# Altium PCB PCB1.PCBDOC
Units mil, origin at the board's own origin, x right, y up, seen from the top; angles counter-clockwise.
Board outline 6000 x 4000 mil, 2 copper layers (Top Layer, Bottom Layer); 31 components, 65 nets, 180 pads, 0 vias.
Unrouted connection lines stored in the file: 104.
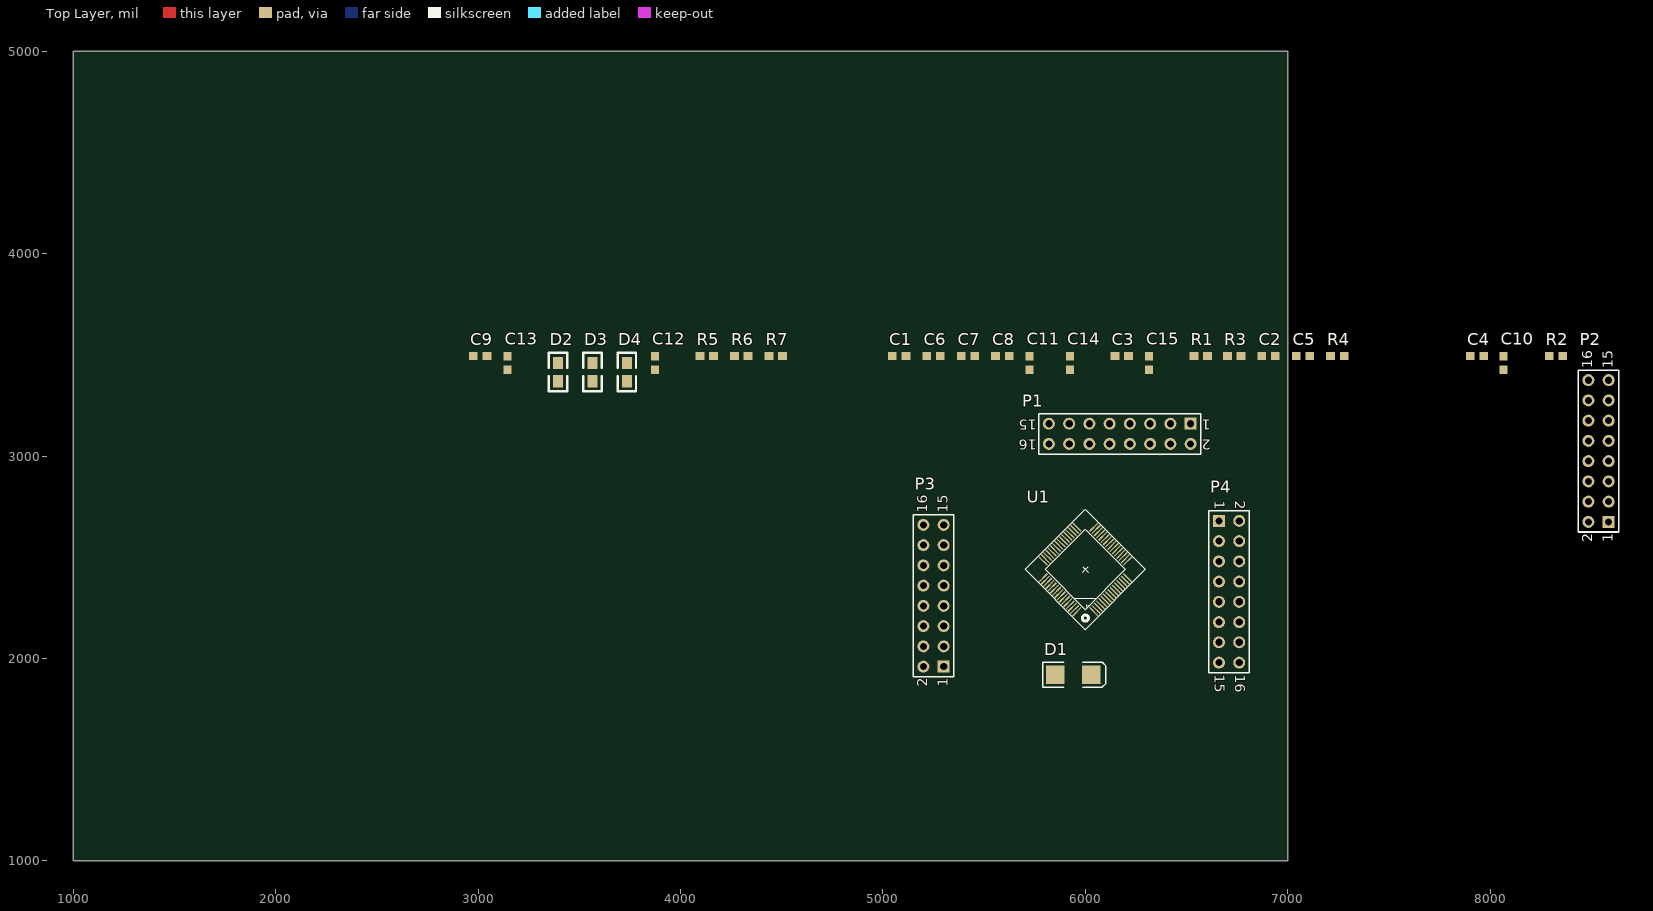
[diagram p0: Top Layer view]
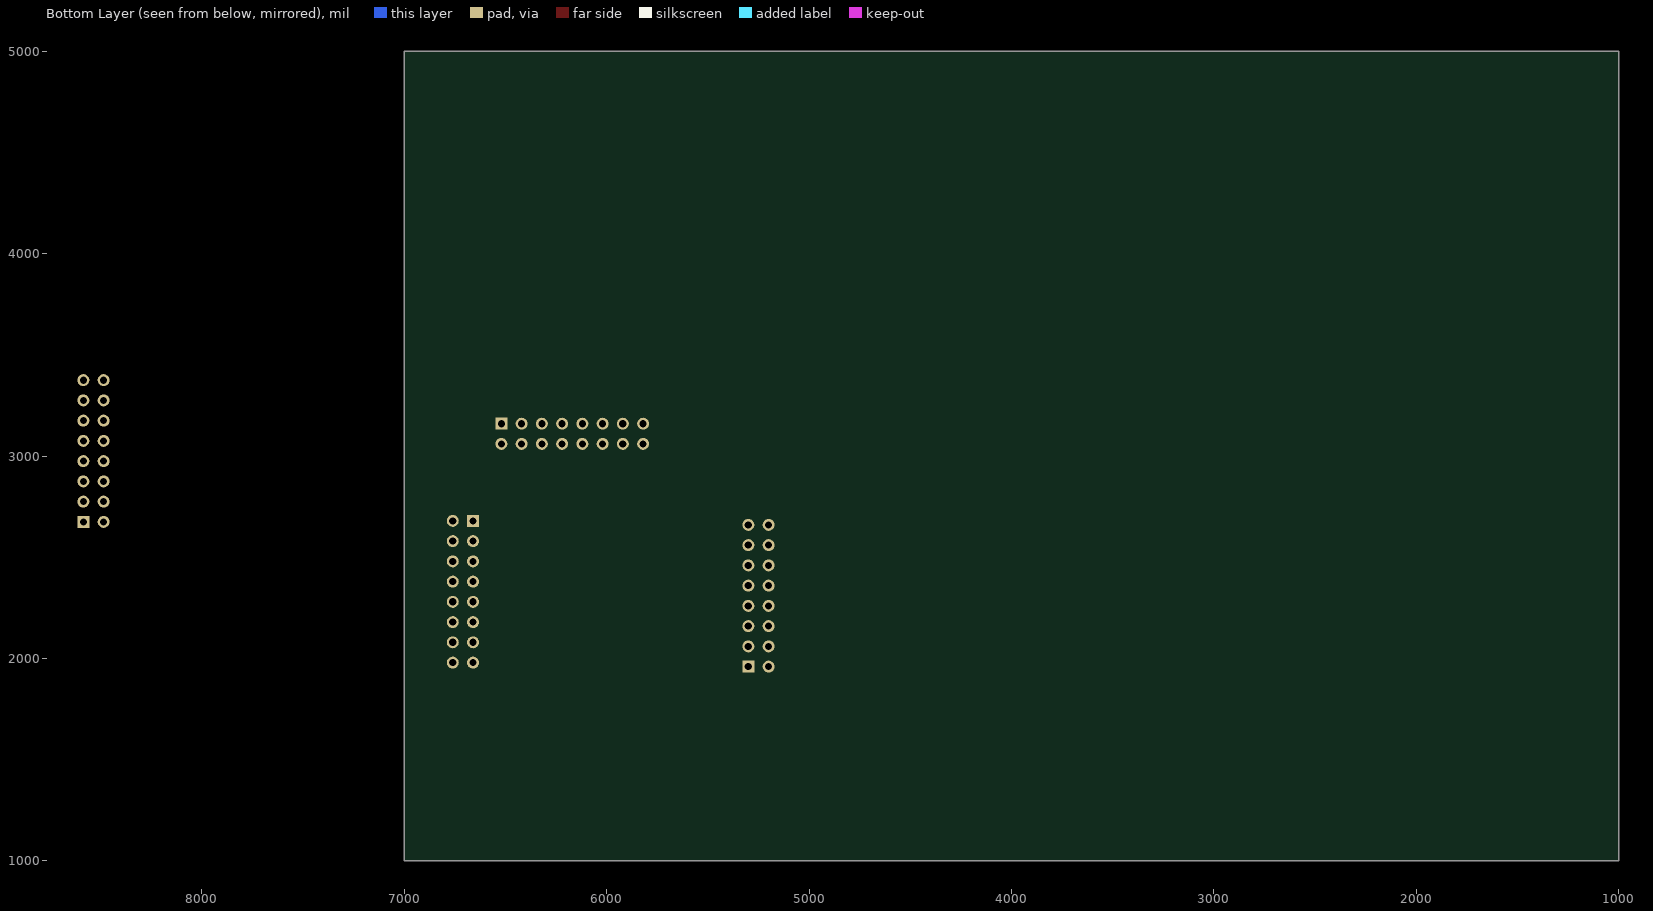
[diagram p1: Bottom Layer view, seen from below]

## Layer stack, top to bottom
Top Layer: signal copper 1.4
Dielectric: dielectric 12.6, FR-4, Dk 4.8
Bottom Layer: signal copper 1.4

## Board outline
1000,1000 7000,1000 7000,5000 1000,5000

## Design rules (kind name [scope] priority, off if disabled: settings)
Clearance [All] p1: gap=10
ComponentClearance [All] p1: gap=10 collisioncheckmode=3 verticalgap=10
PolygonConnect [All] p1: connectstyle=Relief reliefconductorwidth=10 reliefentries=4 polygonreliefangle="90 Angle"
RoutingVias [All] p1: holewidth=28 width=50 viastyle="Through Hole" minholewidth=28 minwidth=50 maxholewidth=28 maxwidth=50
SolderMaskExpansion [All] p1: expansion=4
TestPointUsage [All] p1: valid=0 allowmultiple=FALSE
Testpoint [All] p1: side=15 testpointundercomponent=TRUE minsize=40 maxsize=100 preferedsize=60 minholesize=0 maxholesize=40 preferedholesize=32 testpointgrid=1 style=1023 order=0123456789
Width [All] p1: maxlimit=10 minlimit=10 preferedwidth=10
18 further rules are at their usual default settings.

## Components (designator, comment, footprint, x,y, rotation, side; value= is the part's Value field where it differs from the comment)
C1 "Cap" 1608[0603] 5080,3495 r0 top
C2 "Cap" 1608[0603] 6905,3495 r0 top
C3 "Cap" 1608[0603] 6180,3495 r0 top
C4 "Cap Semi _" 1608[0603] 7935,3495 r0 top
C5 "Cap Semi _" 1608[0603] 7075,3495 r0 top
C6 "Cap" 1608[0603] 5250,3495 r0 top
C7 "Cap" 1608[0603] 5420,3495 r0 top
C8 "Cap" 1608[0603] 5590,3495 r0 top
C9 "Cap" 1608[0603] 3010,3495 r0 top
C10 "Cap Pol2" 1608[0603] 8065,3460 r90 top
C11 "Cap" 1608[0603] 5725,3460 r90 top
C12 "Cap" 1608[0603] 3875,3460 r90 top
C13 "Cap" 1608[0603] 3145,3460 r90 top
C14 "Cap" 1608[0603] 5925,3460 r90 top
C15 "Cap" 1608[0603] 6315,3460 r90 top
D1 "D Schottky" SMB 5940,1920 r0 top
D2 "LED0" 0805 3395,3370 r90 top
D3 "LED0" 0805 3565,3370 r90 top
D4 "LED0" 0805 3735,3370 r90 top
P1 "Header 16" HDR2X8 6520,3160 r180 top
P2 "Header 16" HDR2X8 8585,2675 r90 top
P3 "Header 16" HDR2X8 5300,1960 r90 top
P4 "Header 16" HDR2X8 6660,2680 r270 top
R1 "Res2" 1608[0603] 6570,3495 r0 top
R2 "Res2" 1608[0603] 8325,3495 r0 top
R3 "Res2" 1608[0603] 6735,3495 r0 top
R4 "Res2" 1608[0603] 7245,3495 r0 top
R5 "Res2" 1608[0603] 4130,3495 r0 top
R6 "Res2" 1608[0603] 4300,3495 r0 top
R7 "Res2" 1608[0603] 4470,3495 r0 top
U1 "NUC120_64" PCBComponent_1 6000,2440 r180 top

## Footprints (in the part's own frame and the unit in brackets; to place one, negate y for a bottom-side part, rotate by r counter-clockwise, add the part's x,y. Pads: shape width x height; smd on the part's side, far side on the other; paste and mask are expansions set on the pad)
0805 [mil]
  rect 60x50 smd: 1(0,0) 2(90,0)
  silkscreen extent -50,-45 140,45
1608[0603] [mm] "Chip Capacitor; Body 1.6 x 0.8 mm (LxW typ)"
  rect 1.1x1 smd: 1(-0.85,0) 2(0.85,0)
HDR2X8 [mm] "Connector; Header; 8x2 Position"
  rect 1.5x1.5 hole 0.9: 1(0,0)
  round 1.5 hole 0.9: 2(0,2.54) 3(2.54,0) 4(2.54,2.54) 5(5.08,0) 6(5.08,2.54) 7(7.62,0) 8(7.62,2.54) 9(10.16,0) 10(10.16,2.54) 11(12.7,0) 12(12.7,2.54) 13(15.24,0) 14(15.24,2.54) 15(17.78,0) 16(17.78,2.54)
  silkscreen extent -1.27,-1.27 19.05,3.81
PCBComponent_1 [mil]
  rect 60x7 smd rot 135: 1(-41.76,208.79) 2(-52.89,197.66) 3(-64.03,186.52) 4(-75.16,175.38) 5(-86.3,164.25) 6(-97.44,153.11) 7(-108.57,141.98) 8(-119.71,130.84) 9(-130.84,119.71) 10(-141.98,108.57) 11(-153.11,97.44) 12(-164.25,86.3) 13(-175.38,75.16) 14(-186.52,64.03) 15(-197.66,52.89) 16(-208.79,41.76) 33(41.76,-208.79) 34(52.89,-197.66) 35(64.03,-186.52) 36(75.16,-175.38) 37(86.3,-164.25) 38(97.44,-153.11) 39(108.57,-141.98) 40(119.71,-130.84) 41(130.84,-119.71) 42(141.98,-108.57) 43(153.11,-97.44) 44(164.25,-86.3) 45(175.38,-75.16) 46(186.52,-64.03) 47(197.66,-52.89) 48(208.79,-41.76)
  rect 60x7 smd rot 45: 17(-208.79,-41.76) 18(-197.66,-52.89) 19(-186.52,-64.03) 20(-175.38,-75.16) 21(-164.25,-86.3) 22(-153.11,-97.44) 23(-141.98,-108.57) 24(-130.84,-119.71) 25(-119.71,-130.84) 26(-108.57,-141.98) 27(-97.44,-153.11) 28(-86.3,-164.25) 29(-75.16,-175.38) 30(-64.03,-186.52) 31(-52.89,-197.66) 32(-41.76,-208.79) 49(208.79,41.76) 50(197.66,52.89) 51(186.52,64.03) 52(175.38,75.16) 53(164.25,86.3) 54(153.11,97.44) 55(141.98,108.57) 56(130.84,119.71) 57(119.71,130.84) 58(108.57,141.98) 59(97.44,153.11) 60(86.3,164.25) 61(75.16,175.38) 62(64.03,186.52) 63(52.89,197.66) 64(41.76,208.79)
  silkscreen extent -297,-297 297,297
SMB [mm] "DO-214-AA/SMB; 2 C-Bend Leads; Body 5.3 x 3.6 mm, inc. leads (LxW)"
  rect 2.3x2.3 smd: 1(-2.25,0) 2(2.25,0)
  silkscreen extent -3.8,-1.55 4.1,1.55

## Part data
C1 C2 C3 C6 C7 C8 C9 C11 C12 C13 C14 C15: "Capacitor"
C4 C5: "Capacitor (Semiconductor SIM Model)"
C10: "Polarized Capacitor (Axial)"
D1: "Schottky Diode"
D2 D3 D4: "Typical INFRARED GaAs LED"
P1 P2 P3 P4: "Header, 16-Pin"
R1 R2 R3 R4 R5 R6 R7: "Resistor"

## Nets (pads, with @x,y where several pads share a name; then routed paths per layer and width w, separated by ;. In a path a pad name is that pad's centre, name@x,y a point inside that pad or via, vN(x,y) a via of type N, cw(c..) or ccw(c..) an arc to the next point about the centre after c; other vN are vias at no path point)
AGND: C9.1 C12.1 C13.1 D2.2 P2.11 U1.43
AVCC: C9.2 C12.2 C13.2 P1.4 R5.2 U1.52
"DGND +5": C1.1 C2.1 C3.1 C4.1 C5.1 C6.1 C7.1 C8.1 C10.2 C11.1 C14.1 C15.2 D3.2 P3.16 U1.16 U1.61 U1.63
NetC2_2: C2.2 R1.2 R3.2
NetC15_1: C15.1 U1.18
NetD2_1: D2.1 R5.1
NetD3_1: D3.1 R6.1
NetD4_1: D4.1 R7.1
NetP1_1: P1.1 U1.49
NetP1_2: P1.2 U1.50
NetP1_3: P1.3 U1.51
NetP1_5: P1.5 U1.53
NetP1_6: P1.6 U1.54
NetP1_7: P1.7 U1.55
NetP1_8: P1.8 U1.56
NetP1_9: P1.9 U1.57
NetP1_16: P1.16 U1.64
NetP2_1: P2.1 U1.33
NetP2_2: P2.2 U1.34
NetP2_3: P2.3 U1.35
NetP2_4: P2.4 U1.36
NetP2_5: P2.5 U1.37
NetP2_6: P2.6 U1.38
NetP2_7: P2.7 U1.39
NetP2_8: P2.8 U1.40
NetP2_9: P2.9 U1.41
NetP2_10: P2.10 U1.42
NetP2_12: P2.12 U1.44
NetP2_13: P2.13 U1.45
NetP2_14: P2.14 U1.46
NetP2_15: P2.15 U1.47
NetP2_16: P2.16 U1.48
NetP3_1: P3.1 U1.1
NetP3_2: P3.2 U1.2
NetP3_3: P3.3 U1.3
NetP3_6: P3.6 U1.6
NetP3_7: P3.7 U1.7
NetP3_8: P3.8 U1.8
NetP3_9: P3.9 U1.9
NetP3_10: P3.10 U1.10
NetP3_11: P3.11 U1.11
NetP3_12: P3.12 U1.12
NetP3_13: P3.13 U1.13
NetP3_14: P3.14 U1.14
NetP4_3: P4.3 U1.19
NetP4_4: P4.4 U1.20
NetP4_5: P4.5 U1.21
NetP4_6: P4.6 U1.22
NetP4_7: P4.7 U1.23
NetP4_8: P4.8 U1.24
NetP4_9: P4.9 U1.25
NetP4_10: P4.10 U1.26
NetP4_11: P4.11 U1.27
NetP4_12: P4.12 U1.28
NetP4_14: P4.14 U1.30
NetP4_15: P4.15 U1.31
NetP4_16: P4.16 U1.32
PE.5: D4.2 U1.29
R\E\S\T\: C10.1 R2.1 U1.60
VBUS: D1.1 U1.17
"VCC +5": C1.2 C6.2 C7.2 C8.2 C11.2 C14.2 D1.2 P3.15 R2.2 R6.2 R7.2 U1.15 U1.62
X32I: C5.2 R4.1 U1.5
X32O: C4.2 R4.2 U1.4
XT1_IN: C3.2 R1.1 U1.59
XT1_OUT: R3.1 U1.58
pads on no net: P1.10 P1.11 P1.12 P1.13 P1.14 P1.15 P3.4 P3.5 P4.1 P4.2 P4.13

## Text inside footprints (layer, text, board x,y; h text height)
P1: Top Overlay "2" at 6620,3080 h50 r180; Top Overlay "1" at 6620,3180 h50 r180; Top Overlay "15" at 5760,3180 h50 r180; Top Overlay "16" at 5760,3080 h50 r180
P2: Top Overlay "2" at 8505,2575 h50 r90; Top Overlay "1" at 8605,2575 h50 r90; Top Overlay "15" at 8605,3435 h50 r90; Top Overlay "16" at 8505,3435 h50 r90
P3: Top Overlay "2" at 5220,1860 h50 r90; Top Overlay "1" at 5320,1860 h50 r90; Top Overlay "15" at 5320,2720 h50 r90; Top Overlay "16" at 5220,2720 h50 r90
P4: Top Overlay "2" at 6740,2780 h50 r270; Top Overlay "1" at 6640,2780 h50 r270; Top Overlay "15" at 6640,1920 h50 r270; Top Overlay "16" at 6740,1920 h50 r270